# Altium PCB f1_hw_1_V00.04.PcbDoc
Units mil, origin at the board's own origin, x right, y up, seen from the top; angles counter-clockwise.
Board outline 920 x 1020 mil, 2 copper layers (Top Layer, Bottom Layer); 29 components, 48 nets, 153 pads, 47 vias.
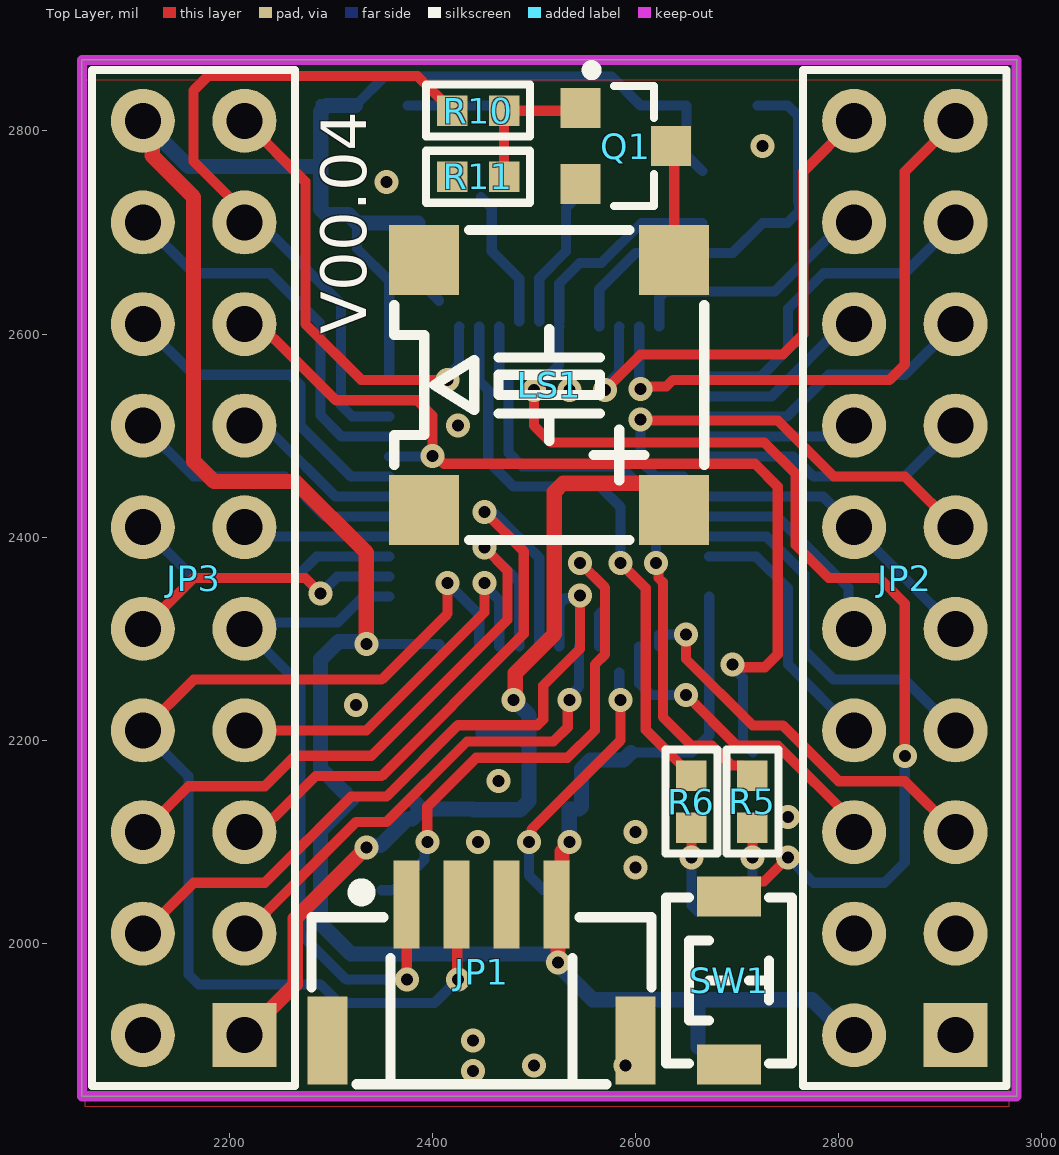
[diagram p0: Top Layer view]
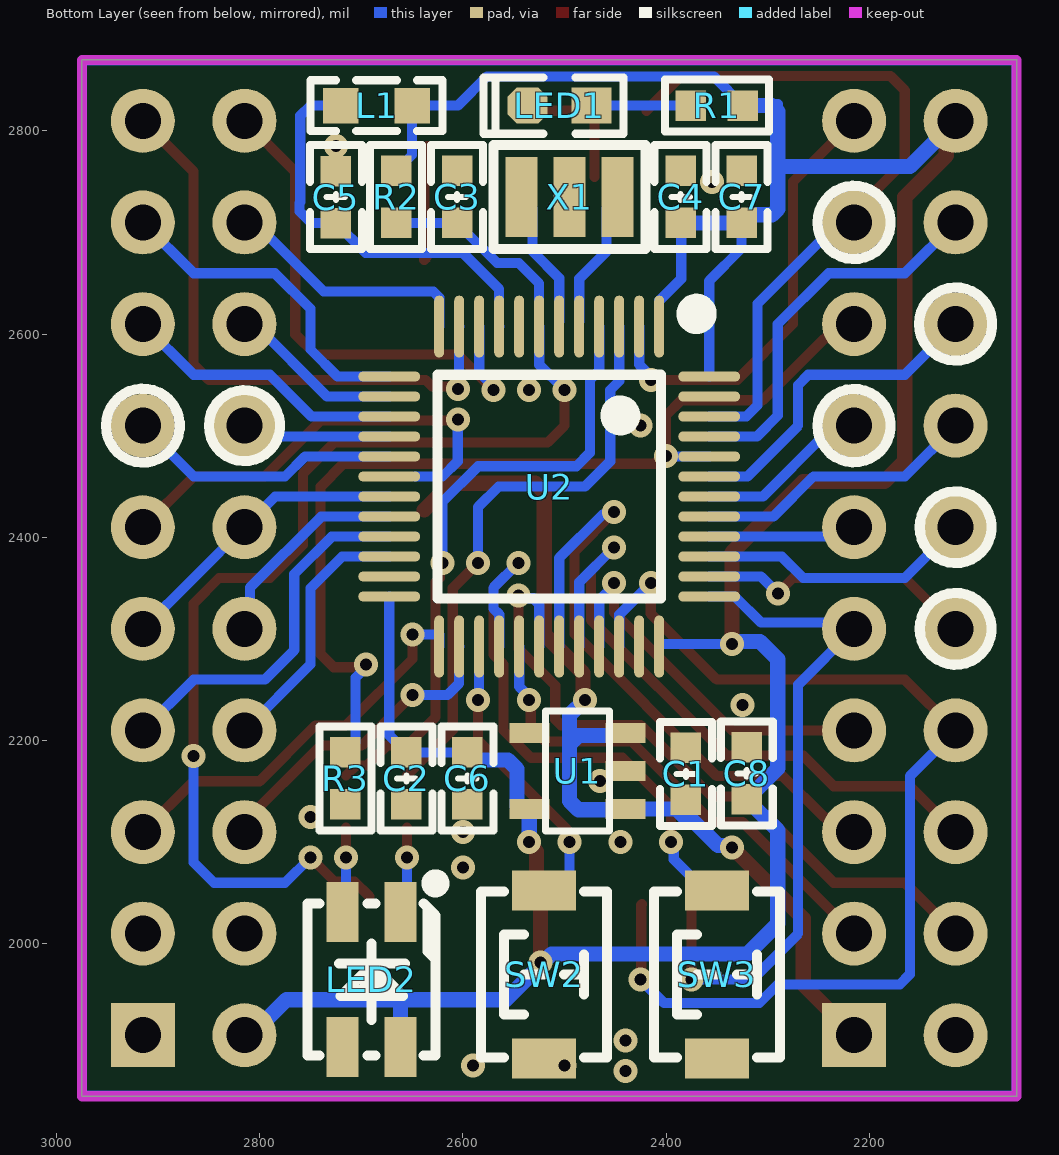
[diagram p1: Bottom Layer view, seen from below]

## Layer stack, top to bottom
Top Solder: solder mask 0.4, Solder Resist, Dk 3.5
Top Layer: signal copper 1.4
Dielectric 1: dielectric 12.6, FR-4, Dk 4.8
Bottom Layer: signal copper 1.4
Bottom Solder: solder mask 0.4, Solder Resist, Dk 3.5

## Board outline
2055,1850 2975,1850 2975,2870 2055,2870

## Design rules (kind name [scope] priority, off if disabled: settings)
Clearance [All] p1: gap=6 ignorepadtopadclearanceinfootprint=TRUE
PlaneConnect [All] p1: planeconnectstyle=Direct reliefexpansion=20 reliefentries=4 reliefconductorwidth=10 reliefairgap=10
PolygonConnect [All] p1: connectstyle=Direct reliefconductorwidth=10 reliefentries=4 polygonreliefangle="90 Angle" airgapwidth=10
RoutingVias [All] p1: holewidth=28 width=50 viastyle="Through Hole" minholewidth=28 minwidth=50 maxholewidth=28 maxwidth=50
SolderMaskExpansion [All] p1: expansion=4 istentingtop=FALSE
SupplyNets "Schematic Supply Nets" [InNet('5V')] p1: voltage=0.000
SupplyNets "Schematic Supply Nets_7" [InNet('3V3VDDA')] p2: voltage=0.000
SupplyNets "Schematic Supply Nets_4" [InNet('3V3')] p3: voltage=0.000
SupplyNets "Schematic Supply Nets_1" [InNet('VSS')] p4: voltage=0.000
Width [All] p1: maxlimit=100 minlimit=10 preferedwidth=10 minimp=50.000000 maximp=50.000000 favimp=50.000000
29 further rules are at their usual default settings.

## Classes and differential pairs
component class FUC: LED2 LS1 Q1 R5 R6 R10 R11 SW2 SW3
component class MCU: C1 C2 C3 C4 C5 C6 C7 C8 JP1 JP2 JP3 L1 LED1 R1 R2 R3 SW1 U1 U2 X1

## Components (designator, comment, footprint, x,y, rotation, side; value= is the part's Value field where it differs from the comment)
C1 "1uF" "C 0603_L" 2380.56,2167.19 r90 bottom
C2 "100nF" "C 0603_L" 2655.55,2162.77 r270 bottom
C3 "100nF/50V" "C 0603_L" 2605.74,2735.06 r90 bottom
C4 "100nF/50V" "C 0603_L" 2385.73,2735.06 r270 bottom
C5 "100nF/50V" "C 0603_L" 2725,2735 r270 bottom
C6 "100nF/50V" "C 0603_L" 2595.56,2162.77 r90 bottom
C7 "100nF/50V" "C 0603_L" 2325.74,2735.06 r270 bottom
C8 "100nF/50V" "C 0603_L" 2320.56,2167.77 r270 bottom
JP1 "HDR-1X4" "GH 1.25-WS-4P" 2448.43,1960.12 r0 top
JP2 "Header 2X10" HDR2.54-LI-2x10P 2865,2360 r90 top locked
JP3 "Header 2X10" HDR2.54-LI-2x10P 2165,2360 r90 top
L1 "0Ω" "L 0603" 2685,2825 r180 bottom
LED1 "Colour" "LED 0603R" 2505,2825 r0 bottom
LED2 "RGB" "LED 3528-RGB" 2690,1965 r270 bottom
LS1 "MLT-7525" BUZZER_7525_S 2515,2550 r270 top locked
Q1 "SS8050" SOT23-3L 2590.71,2785 r270 top
R1 "2K" "R 0603_L" 2350,2825 r0 bottom
R2 "10k" "R 0603_L" 2665.74,2735.06 r90 bottom
R3 "10k" "R 0603_L" 2715.55,2162.77 r270 bottom
R5 "1K" "R 0603_L" 2715,2140 r270 top
R6 "1K" "R 0603_L" 2655,2140 r270 top
R10 "1K" "R 0603_L" 2445,2820 r0 top
R11 "10K" "R 0603_L" 2445,2755 r180 top
SW1 "3.2x4.2x2.5" "TSW SMD-3*4*2" 2692,1964 r90 top
SW2 "3.2x4.2x2.5" "TSW SMD-3*4*2" 2520,1970 r90 bottom
SW3 "3.2x4.2x2.5" "TSW SMD-3*4*2" 2350,1970 r90 bottom
U1 "RT9013-33GB" SOT23-5 2440,2132.6 r90 bottom
U2 "STM32F103C8T6" "LQFP48 7X7_L" 2515,2450 r0 bottom locked
X1 "8M" "OSC 3213-3P" 2495,2735 r180 bottom

## Footprints (in the part's own frame and the unit in brackets; to place one, negate y for a bottom-side part, rotate by r counter-clockwise, add the part's x,y. Pads: shape width x height; smd on the part's side, far side on the other; paste and mask are expansions set on the pad)
BUZZER_7525_S [mm] "8.5x8.5x3mm(长宽高)"
  rect 1.75x1.75 smd: 1(3.125,3.125) 2(-3.125,3.125) 3(-3.125,-3.125) 4(3.125,-3.125)
  silkscreen extent -3.88,-3.88 3.88,3.88, body extent -3.75,-3.75 3.75,3.75, height 2.5
"C 0603_L" [mil] "无极性贴片电容"
  rect 30x30 smd: 1(-25.59,0) 2(25.59,0)
  silkscreen extent -51,-26 51,26, body extent -31,-16 31,16, height 32
"GH 1.25-WS-4P" [mm] "长：8.25mm，宽：4.8mm，高：4.35mm"
  rect 1x2.2 smd: 0(-3.85,-1.4) 100(3.85,-1.4)
  rect 0.65x2.2 smd: 1(-1.875,2) 2(-0.625,2) 3(0.625,2) 4(1.875,2)
  silkscreen extent -4.25,-2.5 4.25,2.4, body extent -4.13,-2.5 4.12,2.35, height 4.35
HDR2.54-LI-2x10P [mm] "双排排针，10x2脚"
  rect 1.6x1.6 hole 0.9: 1(-11.43,-1.27)
  round 1.6 hole 0.9: 2(-11.43,1.27) 3(-8.89,-1.27) 4(-8.89,1.27) 5(-6.35,-1.27) 6(-6.35,1.27) 7(-3.81,-1.27) 8(-3.81,1.27) 9(-1.27,-1.27) 10(-1.27,1.27) 11(1.27,-1.27) 12(1.27,1.27) 13(3.81,-1.27) 14(3.81,1.27) 15(6.35,-1.27) 16(6.35,1.27) 17(8.89,-1.27) 18(8.89,1.27) 19(11.43,-1.27) 20(11.43,1.27)
  silkscreen extent -12.7,-2.54 12.7,2.54, body extent -12.7,-2.54 12.7,2.54, height 8.5
"L 0603" [mil] "小功率贴片电感"
  rect 35x35 smd: 1(-35,0) 2(35,0)
  silkscreen extent -65,-25 65,25, body extent -31,-16 31,16, height 31
"LED 0603R" [mm] "红色0603LED"
  rect 1x0.9 smd: 1(-0.8,0)
  oct 1x0.9 smd: 2(0.8,0)
  silkscreen extent -1.6,-0.7 1.9,0.7, body extent -0.8,-0.4 0.8,0.4, height 0.61
"LED 3528-RGB" [mm] "4脚，3528LED"
  rect 1.5x0.8 smd: 1(1.689,0.725) 2(1.689,-0.725) 3(-1.689,-0.725) 4(-1.689,0.725)
  silkscreen extent -2.5,-1.6 1.9,1.7, body extent -1.75,-1.4 1.75,1.4, height 1.9
"LQFP48 7X7_L" [mm] "48脚，体宽7x7mm，脚距0.5mm"
  oval 0.25x1.55 smd: 1(-2.75,-4) 2(-2.25,-4) 3(-1.75,-4) 4(-1.25,-4) 5(-0.75,-4) 6(-0.25,-4) 7(0.25,-4) 8(0.75,-4) 9(1.25,-4) 10(1.75,-4) 11(2.25,-4) 12(2.75,-4) 25(2.75,4) 26(2.25,4) 27(1.75,4) 28(1.25,4) 29(0.75,4) 30(0.25,4) 31(-0.25,4) 32(-0.75,4) 33(-1.25,4) 34(-1.75,4) 35(-2.25,4) 36(-2.75,4)
  oval 1.55x0.25 smd: 13(4,-2.75) 14(4,-2.25) 15(4,-1.75) 16(4,-1.25) 17(4,-0.75) 18(4,-0.25) 19(4,0.25) 20(4,0.75) 21(4,1.25) 22(4,1.75) 23(4,2.25) 24(4,2.75) 37(-4,2.75) 38(-4,2.25) 39(-4,1.75) 40(-4,1.25) 41(-4,0.75) 42(-4,0.25) 43(-4,-0.25) 44(-4,-0.75) 45(-4,-1.25) 46(-4,-1.75) 47(-4,-2.25) 48(-4,-2.75)
  silkscreen extent -3.93,-4.57 2.79,2.79, body extent -4.5,-4.5 4.5,4.5, height 1.45
"OSC 3213-3P" [mm] "内置电容晶振"
  rect 0.8x2 smd: 1(-1.2,0) 2(1.2,0) 3(0,0)
  silkscreen extent -1.9,-1.3 1.9,1.3, body extent -1.6,-0.65 1.6,0.65, height 1.02
"R 0603_L" [mil] "1/10W贴片电阻"
  rect 30x30 smd: 1(-25.59,0) 2(25.59,0)
  silkscreen extent -51,-26 51,26, body extent -31,-16 31,16, height 16
SOT23-3L [mm] "3x1.3x1mm(长宽高)"
  rect 1x1 smd: 1(-0.95,-1.143) 2(0.95,-1.143) 3(0,1.125)
  silkscreen extent -2.03,-0.99 1.5,0.7, body extent -1.5,-1.2 1.5,1.2, height 1.05
SOT23-5 [mm]
  rect 0.5x1 smd: 1(0,0) 2(0.95,0) 3(1.9,0) 4(1.9,2.4) 5(0,2.4)
  silkscreen extent -0.55,0.4 2.45,2, body extent -0.5,-0.2 2.4,2.6, height 1.09
"TSW SMD-3*4*2" [mm] "3*4*2mm"
  rect 1x1.6 smd: 1(-2.1,0) 2(2.1,0)
  silkscreen extent -2.08,-1.58 2.08,1.58, body extent -2.45,-1.45 2.45,1.45, height 2

## Part data
C1 C2: library part C, "无极性贴片电容", BOM名称=无极性贴片电容, 学习资源=www.ooocke.com, 版权归属=源创客
C3 C4 C5 C6 C7 C8: library part 无极贴片电容, "贴片电容"
JP1: library part "Header 4", "4P接插件", BOM名称=4P接插件, 学习资源=www.ooocke.com, 版权归属=源创客
JP2 JP3: library part "Header 10X2", "10*2P接插件", BOM名称=10*2P接插件, 学习资源=www.ooocke.com, 版权归属=源创客
L1: library part 磁珠, "小功率贴片电感"
LED1: library part LED-SMD, "贴片LED", BOM名称=贴片LED, 学习资源=www.ooocke.com, 版权归属=源创客
LED2: library part LED-RGB-A, "共阳三基色LED", BOM名称=三基色LED, 学习资源=www.ooocke.com, 版权归属=源创客
LS1: library part Buzzer, "蜂鸣器", BOM名称=蜂鸣器, 学习资源=www.ooocke.com, 版权归属=源创客
Q1: library part 8050-SMD, "高频放大-NPN型", BOM名称=高频放大-NPN型, 学习资源=www.ooocke.com, 属性="40V 1.5A 1W 100MHZ", 版权归属=源创客
R1 R2 R3: library part 电阻, "贴片电阻1%精度"
R5 R6 R10 R11: library part R, "贴片电阻", BOM名称=贴片电阻, 学习资源=www.ooocke.com, 版权归属=源创客
SW1 SW2 SW3: library part "TSW SMD-3x4_D", "3.2x4.2轻触开关", BOM名称=3x6轻触开关, 学习资源=www.ooocke.com, 版权归属=源创客
U1: library part RT9193-33GB
U2: "STM32F103C8T6是一款由意法半导体公司（ST）推出的基于Cortex-M3内核的32位微控制器，硬件采用LQFP48封装，属于ST公司微控制器中的STM32系列。"
X1: library part XTAL-3P, "3脚内置电容无源晶振"

## Via types
v1: diameter 23.62, hole 11.81, Top Layer to Bottom Layer, 47 vias

## Nets (pads, with @x,y where several pads share a name; then routed paths per layer and width w, separated by ;. In a path a pad name is that pad's centre, name@x,y a point inside that pad or via, vN(x,y) a via of type N, cw(c..) or ccw(c..) an arc to the next point about the centre after c; other vN are vias at no path point)
3V3: C2.1 C4.2 C6.2 C7.2 C8.2 JP1.4 JP2.2 JP3.20 L1.2 LED2.1 R1.1 R2.2 U1.5 U2.1 U2.24 U2.36 U2.48 | length 3271
  Top Layer w15: JP3.20 2124.18,2800.82 2124.18,2775.82 2165,2735 2165,2475 2185,2455 2265,2455 2335,2385 v1(2335,2295) ; v1(2523.62,1981.38) 2523.62,2037.48 JP1.4 2527.54,2044.15 2527.54,2090.72 2534.74,2097.92 v1(2534.74,2100.26) ; JP2.2 JP2.2@2815,1917.78
  Bottom Layer w10: 2290,2819.15 2290,2826.31 ; R1.1 2353.12,2853.72 2576.28,2853.72 2605,2825 L1.2 2650,2776.39 R2.2 ; C7.2 2325.74,2684.26 2357.54,2652.46 U2.48 ; v1(2335,2295) 2406.65,2295 2406.73,2294.92 U2.36 ; C4.2@2385,2708.73 2385,2654.63 U2.1@2406.65,2632.98 ; C6.2 C2.1 2672.46,2205.27 U2.24
  Bottom Layer w15: JP3.20 2160,2765 2288.34,2765 2290,2766.67 ; C8.2@2314.17,2148.58 2290,2172.75 2290,2280 2307.61,2297.61 2332.39,2297.61 v1(2335,2295) ; C8.2 2290,2111.62 2290,2020 2320,1990 2512.67,1990 2522.46,1980.21 2557.67,1945 2661.46,1945 ; R1.1 2295.86,2825 2290,2819.15 2290,2766.67 ; C4.2@2385,2708.73 C4.2 C7.2 2317.74,2717.47 2295.86,2717.47 2290,2723.33 2290,2766.67 ; v1(2534.74,2100.26) 2534.62,2100.38 2534.62,2132.47 U1.5 2544.33,2132.6 2546.67,2134.94 2546.67,2172.08 2555.46,2180.86 2588.06,2180.86 C6.2 ; LED2.1 2661.46,1945 ; JP2.2 2808.64,1910 2773.64,1945 2661.46,1945
3V3VDDA: C5.2 L1.1 U2.9 | length 403.8
  Bottom Layer w10: U2.9 2564.29,2607.54 2564.29,2644.29 2600,2680 2695.59,2680 C5.2 2749.41,2709.41 2760.86,2720.86 2760.86,2729.14 2760,2730 2760,2815 2750,2825 L1.1
5V: C1.1 JP3.1 LS1.1 U1.1 U1.3 | length 936
  Top Layer w15: JP3.1 2265,1960 2265,2025 v1(2335,2095) ; v1(2480,2240) 2481.65,2241.65 2481.65,2266.65 2520,2305 2520,2444.55 2528.79,2453.34 2611.66,2453.34 LS1.1
  Bottom Layer w15: v1(2335,2095) 2336.65,2096.65 2348.98,2096.65 2375.2,2122.86 2379.82,2122.86 C1.1@2389.55,2132.6 ; C1.1 C1.1@2389.55,2132.6 ; U1.3@2449.84,2207.4 2452.19,2205.06 2486.21,2205.06 2495,2196.27 ; v1(2480,2240) 2495,2225 2495,2196.27 ; C1.1@2389.55,2132.6 U1.1 2440.72,2131.88 2486.21,2131.88 2495,2140.66 2495,2196.27
A00_P10: JP2.20 U2.10 | length 516.7
  Top Layer w10: v1(2570,2545) 2605,2580 2745,2580 2765,2600 2765,2760 JP2.20
  Bottom Layer w10: v1(2570,2545) 2570,2548.69 2583.82,2562.51 2583.82,2607.39 U2.10
A01_P11: JP2.19 U2.11 | length 592.9
  Top Layer w10: v1(2605,2545.83) 2607.61,2548.43 2630.24,2548.43 2636.81,2555 2850,2555 2865,2570 2865,2760 JP2.19
  Bottom Layer w10: U2.11 2603.66,2607.39 2603.66,2547.17 v1(2605,2545.83)
A02_P12: JP2.18 U2.12 | length 251
  Bottom Layer w10: U2.12 2623.27,2636.17 2629.13,2642.02 2737.02,2642.02 2805,2710 JP2.18
A03_P13: JP2.17 U2.13 | length 328.8
  Bottom Layer w10: U2.13 2723.27,2558.27 2750,2585 2750,2625 2785,2660 2865,2660 JP2.17
A04_P14: JP2.16 U2.14 | length 172.1
  Bottom Layer w10: U2.14 2733.58,2538.58 2805,2610 JP2.16
A05_P15: JP2.15 U2.15 | length 280.3
  Bottom Layer w10: U2.15 2748.9,2518.9 2790,2560 2865,2560 JP2.15
A06_P16: JP2.14 U2.16 | length 147
  Bottom Layer w10: U2.16 2789.87,2499.21 2800.66,2510 JP2.14
A07_P17: JP2.13 U2.17 | length 271.3
  Bottom Layer w10: U2.17 2755.47,2479.53 2775,2460 2865,2460 JP2.13
A08_P29: JP3.3 U2.29 | length 486.4
  Top Layer w10: JP3.3 2325,2120 2355,2120 2434.06,2199.06 2519.06,2199.06 2533.19,2213.19 2533.19,2238.19 v1(2535,2240)
  Bottom Layer w10: v1(2535,2240) 2535,2243.69 2544.45,2253.14 2544.45,2292.46 U2.29
A09_P30: JP3.4 U2.30 | length 684
  Top Layer w10: JP3.4 2165,2060 2235,2060 2320,2145 2355,2145 2425.06,2215.06 2503.28,2215.06 2509.14,2220.92 2509.14,2254.14 2545.31,2290.31 v1(2545.31,2342.74)
  Bottom Layer w10: U2.30 2524.84,2334.31 2530.7,2340.17 2542.74,2340.17 v1(2545.31,2342.74)
A10_P31: JP3.5 U2.31 | length 651.7
  Top Layer w10: JP3.5 2229.34,2110 2244.72,2125.38 2245.38,2125.38 2285,2165 2350,2165 2490,2305 2490,2386.25 v1(2451.25,2425)
  Bottom Layer w10: v1(2451.25,2425) 2453.86,2422.39 2462.61,2422.39 2505.16,2379.84 U2.31
A11_P32: JP3.6 U2.32 | length 637.6
  Top Layer w10: JP3.6 2160,2155 2191.62,2155 2235,2155 2265,2185 2340,2185 2474,2319 2474,2367.25 v1(2451.25,2390)
  Bottom Layer w10: v1(2451.25,2390) 2485.47,2355.78 U2.32
A12_P33: JP3.7 U2.33 | length 381.7
  Top Layer w10: JP3.7 2335,2210 2451.25,2326.25 2451.25,2354.94 v1(2451.19,2355)
  Bottom Layer w10: v1(2451.19,2355) 2451.19,2352.65 2465.79,2338.05 U2.33
A13_P34: JP1.2 JP3.8 U2.34 | length 1072.4
  Top Layer w10: JP3.8 2165,2260 2350,2260 2415,2325 v1(2415,2355) ; JP1.2 2424.41,2038.27 2424.41,1965.28 v1(2425,1964.69)
  Bottom Layer w10: JP3.8 2160,2165 2160,1970 2170,1960 2290,1960 2308.12,1941.88 2402.19,1941.88 v1(2425,1964.69) ; v1(2415,2355) 2446.1,2323.9 U2.34
A14_P37: JP1.1 JP3.9 U2.37 | length 676.6
  Top Layer w10: JP1.1 2374.8,2038.66 2374.8,1964.89 v1(2375,1964.69)
  Bottom Layer w10: U2.37 2332.1,2341.73 2306.48,2316.11 2221.11,2316.11 JP3.9 2270,2255 2270,2010 2315.31,1964.69 v1(2375,1964.69)
A15_P38: JP3.10 U2.38 | length 276.3
  Top Layer w10: JP3.10 2165,2360 2275,2360 v1(2290,2345)
  Bottom Layer w10: v1(2290,2345) 2306.42,2361.42 U2.38
B00_P18: JP2.11 U2.18 | length 443.4
  Top Layer w10: v1(2605,2516.2) 2606.2,2515 2740,2515 2795,2460 2865,2460 JP2.11
  Bottom Layer w10: v1(2605,2516.2) 2605,2475 2620.08,2459.92 U2.18@2646.95,2459.92
B01_P19: JP2.9 JP2.12 U2.19 | length 296.4
  Bottom Layer w10: U2.19 2784.84,2440.16 JP2.12@2813.37,2411.62 ; JP2.12@2813.38,2411.62 2865,2360 JP2.9
B02_P20: JP2.10 U2.20 | length 208.8
  Bottom Layer w10: U2.20 2739.53,2420.47 2809.62,2350.38 2809.62,2315.38 JP2.10
B03_P39: JP3.12 U2.39 | length 272
  Bottom Layer w10: JP3.12 2165,2360 2265,2360 2286.1,2381.1 U2.39
B04_P40: JP3.11 U2.40 | length 146.4
  Bottom Layer w10: JP3.11 2224.13,2400.87 2357.46,2400.87 U2.40
B05_P41: JP3.14 U2.41 | length 279.6
  Bottom Layer w10: JP3.14 2165,2460 2255,2460 2294.53,2420.47 U2.41
B06_P42: JP3.13 U2.42 | length 171.5
  Bottom Layer w10: JP3.13 2225.14,2499.86 2245.14,2499.86 2304.84,2440.16 U2.42
B07_P43: JP3.16 U2.43 | length 328.2
  Bottom Layer w10: JP3.16 2165,2560 2260,2560 2270,2550 2270,2510 2320.16,2459.84 U2.43
B08_P45: JP3.18 U2.45 | length 382.6
  Bottom Layer w10: JP3.18 2165,2660 2240,2660 2290,2610 2290,2520 2310.79,2499.21 U2.45
B09_P46: JP3.17 R10.1 U2.46 | length 705.3
  Top Layer w10: JP3.17 2215,2720 2165,2770 2165,2840 2179,2854 2385.4,2854 R10.1
  Bottom Layer w10: JP3.17 2229.34,2710 2244.72,2694.62 2245.38,2694.62 2310,2630 2310,2530 2321.02,2518.98 2357.46,2518.98 U2.46
B10_P21: JP2.7 U2.21 | length 365.5
  Bottom Layer w10: U2.21 2729.21,2400.79 2766,2364 2766,2289 2795,2260 2865,2260 JP2.7
B11_P22: JP2.8 U2.22 | length 257.3
  Bottom Layer w10: U2.22 2718.9,2381.1 2750,2350 2750,2275 JP2.8
B12_P25: JP2.5 U2.25 | length 397.9
  Top Layer w10: v1(2649.65,2304.27) 2649.65,2280.35 2715,2215 2745,2215 2800,2160 2865,2160 JP2.5
  Bottom Layer w10: U2.25 2623.27,2304.19 2623.35,2304.27 v1(2649.65,2304.27)
B13_P26: JP2.6 U2.26 | length 314
  Top Layer w10: v1(2649.65,2245) 2699.65,2195 2740,2195 2815,2120 JP2.6
  Bottom Layer w10: U2.26 2603.66,2292.46 2603.66,2256.34 2615,2245 v1(2649.65,2245)
B14_P27: SW2.2 U2.27 | length 268.4
  Top Layer w10: v1(2495,2100) 2497.61,2102.61 2497.61,2112.61 2585,2200 v1(2585,2240)
  Bottom Layer w10: v1(2495,2100) 2495,2067.36 2509.69,2052.68 SW2.2 ; U2.27@2583.98,2267.02 2583.98,2241.02 v1(2585,2240)
B15_P28: SW3.2 U2.28 | length 578.4
  Top Layer w10: v1(2395,2100) 2395,2135 2443.06,2183.06 2533.06,2183.06 2560,2210 2560,2275 2570,2285 2570,2350.31 v1(2545.31,2375)
  Bottom Layer w10: SW3.2 2361.81,2052.68 2392.39,2083.26 2392.39,2097.39 v1(2395,2100) ; v1(2545.31,2375) 2570,2350.31 2570,2330 2564.21,2324.21 U2.28
BOOT0: JP3.15 R3.1 U2.44 | length 968.3
  Top Layer w10: JP3.15 2229.34,2610 2244.72,2594.62 2245.38,2594.62 2305,2535 2385,2535 2400,2520 v1(2400,2480) 2403.69,2480 2411.27,2472.42 2717.58,2472.42 2740,2450 2740,2285 2727.12,2272.12 2697.88,2272.12 v1(2695.28,2274.72)
  Bottom Layer w10: U2.44 2357.61,2479.61 2399.61,2479.61 v1(2400,2480) ; v1(2695.28,2274.72) 2695.28,2272.33 2705.55,2262.06 2705.55,2198.36 R3.1
C13_P02: JP3.19 U2.2 | length 444.8
  Top Layer w10: JP3.19 2275,2750 2275,2610 2330,2555 v1(2415,2555)
  Bottom Layer w10: v1(2415,2555) 2415,2558.69 2426.34,2570.02 2426.34,2607.39 U2.2
C14_P03: R6.1 U2.3 | length 578.2
  Top Layer w10: v1(2585,2375) 2610,2350 2610,2210.59 R6.1
  Bottom Layer w10: U2.3 2446.1,2553.9 2455,2545 2455,2475 2480,2450 2565,2450 2585,2430 v1(2585,2375)
C15_P04: R5.1 U2.4 | length 619.7
  Top Layer w10: v1(2620,2374.71) 2622.61,2372.1 2622.61,2360.02 2626.84,2355.78 2626.84,2223.16 2655,2195 2675,2195 2694.41,2175.59 2705,2175.59 R5.1
  Bottom Layer w10: U2.4 2465.79,2564.21 2475,2555 2475,2483.22 2488.22,2470 2585,2470 2620,2435 v1(2620,2374.71)
NetLED1_1: LED1.1 R1.2 | length 97.9
  Bottom Layer w10: R1.2 LED1.1
NetLED2_3: LED2.3 R5.2 | length 84.4
  Top Layer w10: v1(2715,2085) R5.2
  Bottom Layer w10: v1(2715,2085) 2715,2035.05 LED2.3
NetLED2_4: LED2.4 R6.2 | length 85.6
  Top Layer w10: v1(2655,2085) R6.2
  Bottom Layer w10: v1(2655,2085) 2655,2037.96 LED2.4
NetLS1_2: LS1.2 Q1.3 | length 116.5
  Top Layer w10: Q1.3 2638.03,2781.97 LS1.2 LS1.2@2635.71,2675.35
NetQ1_1: Q1.1 R10.2 R11.1 | length 141.1
  Top Layer w10: R11.1 R10.2 2543.3,2820 Q1.1
NRST: C3.1 R2.1 SW1.2 U2.7 | length 1251.6
  Top Layer w10: v1(2500,2545) 2500,2510 2516.61,2493.39 2726.61,2493.39 2757.5,2462.5 2757.5,2392.5 2790,2360 2840,2360 2865,2335 v1(2865,2185) ; SW1.2 2706.69,2061.36 2726.36,2061.36 v1(2750,2085)
  Bottom Layer w10: v1(2500,2545) 2524.76,2569.76 2524.76,2607.39 U2.7 ; U2.7@2524.92,2612.54 2524.92,2649.92 2545,2670 2566.27,2670 C3.1 R2.1 ; v1(2750,2085) 2775,2060 2845,2060 2865,2080 v1(2865,2185)
OSC_IN: U2.5 X1.2 | length 138.2
  Bottom Layer w10: X1.2 2458.5,2724.25 2458.5,2681.5 2485.47,2654.53 U2.5@2485.47,2612.46
OSC_OUT: U2.6 X1.1 | length 137.9
  Bottom Layer w10: U2.6@2505.16,2612.46 2505.16,2655.16 2531.5,2681.5 2531.5,2724.25 X1.1
VSS: C1.2 C2.2 C3.2 C4.1 C5.1 C6.1 C7.1 C8.1 JP1.0 JP1.3 JP1.100 JP2.1 JP3.2 LED1.2 Q1.2 R3.2 R11.2 SW1.1 SW2.1 SW3.1 U1.2 U2.8 U2.23 U2.35 U2.47 X1.3
  other v1: 2440,1875 2500,1880 2590,1880 2440,1905 2600,2075 2445,2100 2600,2110 2750,2125 2465,2160 2325,2235 2425,2510 2535,2545 2355,2750 2725,2785
pads on no net: JP2.3 JP2.4 LED2.2 LS1.3 LS1.4 U1.4

## Polygon pours and split planes (outlines as drawn)
VSS on Top Layer "NONET_L01_P000" (solid, shelved, pour order 0): 2058.01,1840 2968.01,1840 2968.01,2850 2058.01,2850
VSS on Bottom Layer "NONET_L02_P001" (solid, shelved, pour order 1): 2060,1855 2970,1855 2970,2865 2060,2865

## Keep-outs
Keep-Out Layer:
  the board outline again, w10

## Silkscreen, mask and mechanical layers (free items; w line width, h text height)
Top Overlay:
  text "V00.04" at 2335,2600 h45 r90
Bottom Overlay:
  circle w10: c2215,2710 r36.06
  circle w10: c2915,2510 r36.4
  circle w10: c2815,2510 r35
  circle w10: c2115,2310 r35.36
  circle w10: c2215,2510 r36.06
  circle w10: c2115,2410 r35.36
  circle w10: c2115,2610 r36.06